# EAGLE board PulseSensor (EAGLE 7.3.0)
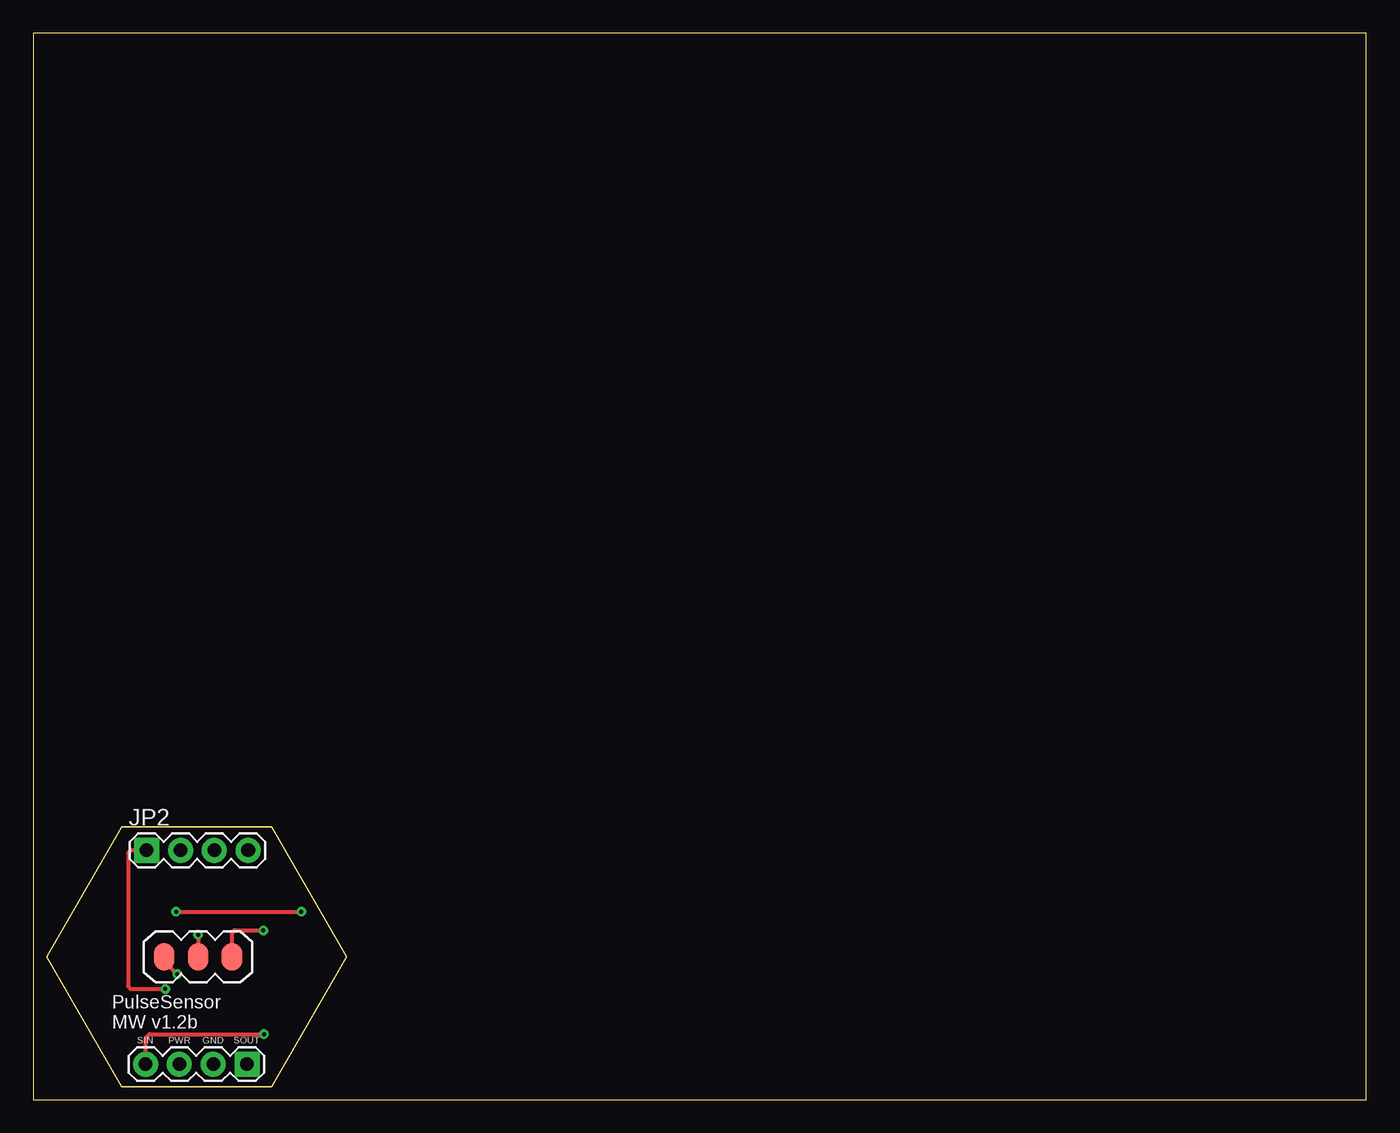
[diagram p0: board, top side]
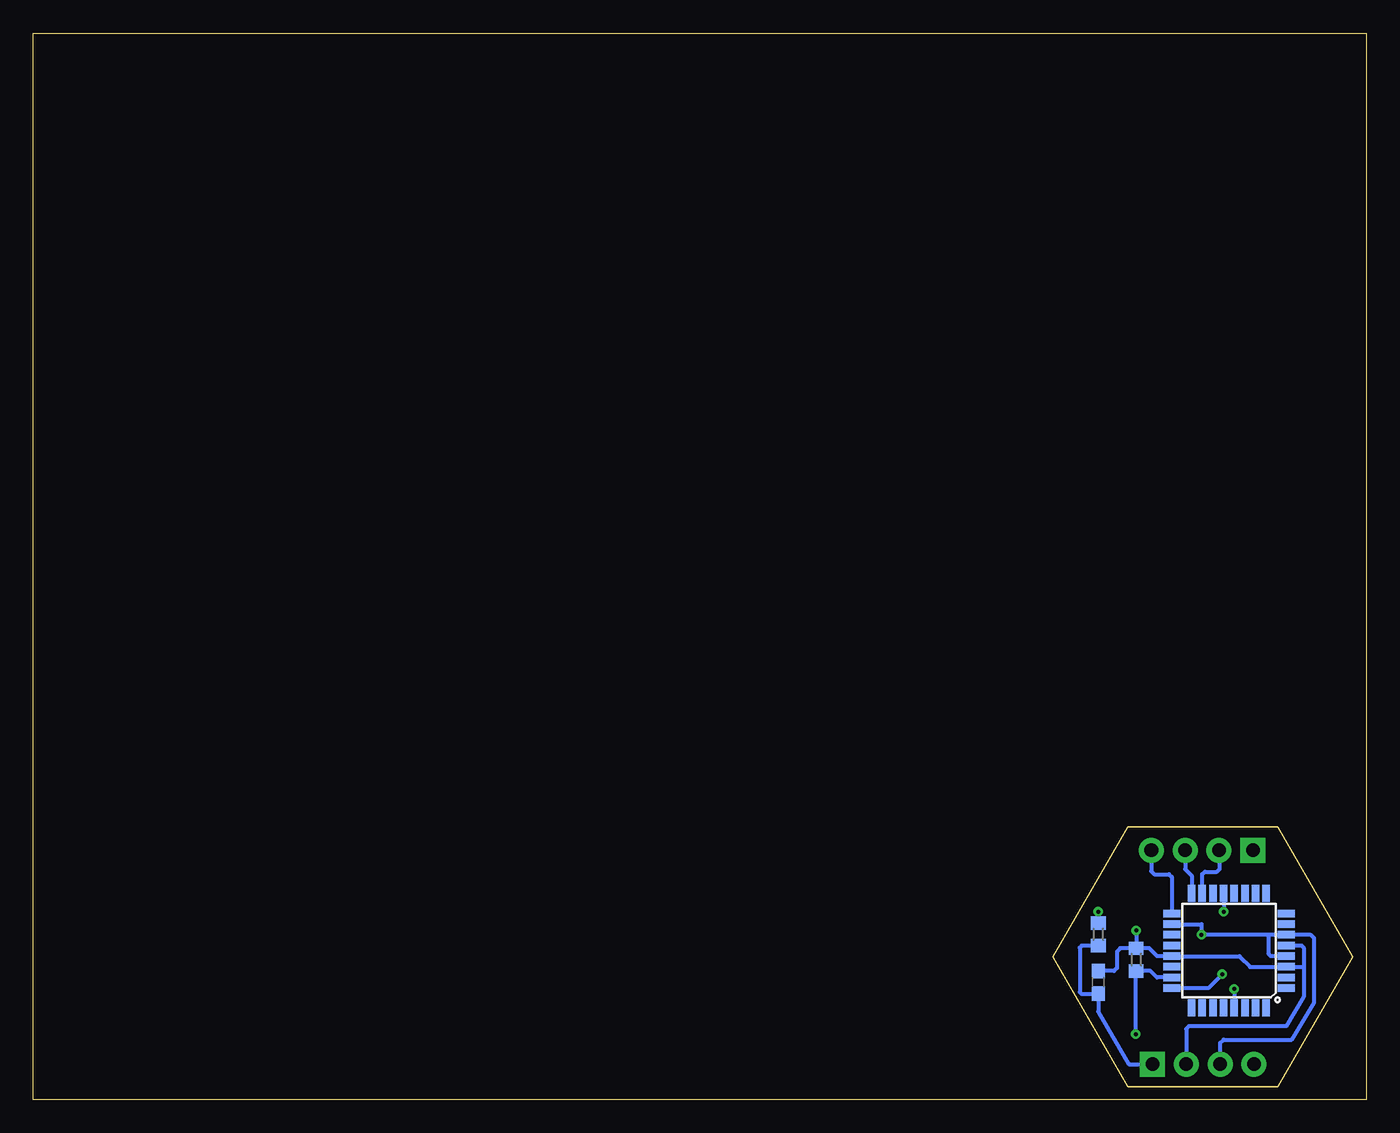
[diagram p1: board, bottom side, seen from below]

Size 100 x 80 mm. Coordinates in mm from the lower left corner, seen from the top.
Outline: 0,0 100,0 100,80 0,80 0,0
Outline: 23.49,10.7 17.86,0.96 6.61,0.96 0.99,10.7 6.61,20.44 17.86,20.44 23.49,10.7
Copper layers (1*16): Top 0.035mm / dielectric 1.5mm / Bottom 0.035mm
Design rules "default *": minimum track width 10mil, minimum drill 24mil, track to track 8mil, track to pad 8mil, pad to pad 8mil, via to via 8mil, smd to smd 8mil, copper to edge 0mil, drill to drill 8mil, minimum pad ring 10mil, minimum via ring 8mil, stop-mask expansion 4mil, vias tented up to drill 0mil, thermal gap 10mil

## Footprints (pad centres in the part's own frame; a part is rotated, then mirrored left to right if it is on the bottom)
C0603 = smd 1.1 x 1: 1 -0.85,0; 2 0.85,0
1X04 = drill 1.016 pad 1.88 square: 1 0,0 | drill 1.016 pad 1.88: 2 2.54,0; 3 5.08,0; 4 7.62,0
1X03_NO_HOLES = smd 1.524 x 2.032: 1 0,0; 2 2.54,0; 3 5.08,0
R0603 = smd 1 x 1.1: 1 -0.85,0; 2 0.85,0
TQFP32-08 = smd 1.27 x 0.559: 1 -4.293,2.8; 2 -4.293,2; 3 -4.293,1.2; 4 -4.293,0.4; 5 -4.293,-0.4; 6 -4.293,-1.2; 7 -4.293,-2; 8 -4.293,-2.8; 17 4.293,-2.8; 18 4.293,-2; 19 4.293,-1.2; 20 4.293,-0.4; 21 4.293,0.4; 22 4.293,1.2; 23 4.293,2; 24 4.293,2.8 | smd 0.559 x 1.27: 9 -2.8,-4.293; 10 -2,-4.293; 11 -1.2,-4.293; 12 -0.4,-4.293; 13 0.4,-4.293; 14 1.2,-4.293; 15 2,-4.293; 16 2.8,-4.293; 25 2.8,4.293; 26 2,4.293; 27 1.2,4.293; 28 0.4,4.293; 29 -0.4,4.293; 30 -1.2,4.293; 31 -2,4.293; 32 -2.8,4.293

## Placement (x,y rotation side)
C3  0.22uF  [C0603]  20.1,8.8 90 bottom
JP1  [1X04]  16.04,2.66 180 top
JP2  [1X04]  8.5,18.7 0 top
JP3  [1X03_NO_HOLES]  14.9,10.7 180 top
R1  1M  [R0603]  17.26,10.5 270 bottom
R4  4.7K  [R0603]  20.1,12.4 90 bottom
U2  ATMEGA328P_TQFP  [TQFP32-08]  10.3,11.16 180 bottom

## Library data of the parts
C3 R1 R4 = adafruit
JP1-JP3 = SparkFun-Connectors
U2 = SparkFun-DigitalIC; PROD_ID: IC-09069

## Nets
1X3SIN: JP1.4 R1.2 U2.23
1X3SOUT: C3.1 JP1.1 R4.1
GND: C3.2 JP1.2 JP3.1 R1.1 U2.3 U2.5 U2.21
MISO: JP2.3 U2.16
MOSI: JP2.2 U2.15
OUT: R4.2 U2.13
PULSE-IN: JP3.3 U2.24
RESET: JP2.1 U2.29
SCK: JP2.4 U2.17
VCC: JP1.3 JP3.2 U2.4 U2.6 U2.18

## Tracks (layer width: path | path; a pad name or v marks a point on that pad's centre or on a via)
1X3SIN  (via drill 0.3 pad 0.25)
  Top 0.305: JP1.4 8.42,4.62 8.7,4.9 v17.3,4.9
  Bottom 0.305: U2.23 15.7,9.16 16.18,9.64 R1.2 17.3,9.61 v17.3,4.9
1X3SOUT
  Bottom 0.305: R4.1 21.35,11.55 21.5,11.4 21.5,8.07 21.37,7.94 C3.1 20.1,6.6 17.79,2.65 JP1.1
GND  (via drill 0.3 pad 0.25)
  Top 0.305: JP3.1 14.9,12.5 15.1,12.7 17.23,12.7 v17.25,12.68
  Bottom 0.305: R1.1 18.45,11.35 18.7,11.1 18.7,9.87 18.93,9.64 C3.2 | R1.1 16.27,11.35 15.68,10.76 U2.21 9.51,10.76 8.7,9.95 U2.3 4.74,9.96 4.7,10 | U2.5 4.86,11.56 4.7,11.4 4.7,10 | 4.7,10 4.7,7.7 6,5.5 13.3,5.5 13.5,5.3 JP1.2 | v17.25,12.68 R1.1
MISO
  Bottom 0.305: JP2.3 13.58,17.28 13.1,16.8 U2.16
MOSI
  Bottom 0.305: U2.15 12.3,16.9 12.1,17.1 11.2,17.1 11,17.3 11,18.66 JP2.2
OUT  (via drill 0.3 pad 0.25)
  Top 0.305: v10.7,14.1 v20.1,14.1
  Bottom 0.305: U2.13 v10.7,14.1 | v20.1,14.1 R4.2
PULSE-IN  (via drill 0.3 pad 0.25)
  Top 0.305: JP3.3 9.82,10.38 v10.8,9.4
  Bottom 0.305: v10.8,9.4 v10.81,9.4 11.85,8.36 U2.24
RESET  (via drill 0.3 pad 0.25)
  Top 0.305: JP2.1 7.3,18.7 7.1,18.5 7.1,8.5 7.3,8.3 v9.9,8.3
  Bottom 0.305: v9.9,8.3 U2.29
SCK
  Bottom 0.305: JP2.4 16.12,17.12 15.9,16.9 14.8,16.9 14.6,16.7 U2.17
VCC  (via drill 0.3 pad 0.25)
  Top 0.305: v12.36,12.37 JP3.2
  Bottom 0.305: U2.4 7.16,10.76 7.3,10.9 7.3,12.3 7.24,12.36 U2.6 | U2.6 v12.35,12.36 v12.36,12.37 12.36,13.16 U2.18 | JP1.3 10.96,4.24 10.7,4.5 5.6,4.5 3.9,7.3 3.9,12.11 4.14,12.35 6,12.35 U2.6

## Text on the board
tPlace: PulseSensor / MW v1.2b | SIN | PWR | GND | SOUT